# Altium PCB 24+Channel+PCB.pcbdoc (part 4 of 4)
Units mm, origin at the board's own origin, x right, y up, seen from the top; angles counter-clockwise.
Board outline 213.4 x 117.5 mm, 2 copper layers (Top Layer, Bottom Layer); 559 components, 339 nets, 1681 pads, 746 vias.
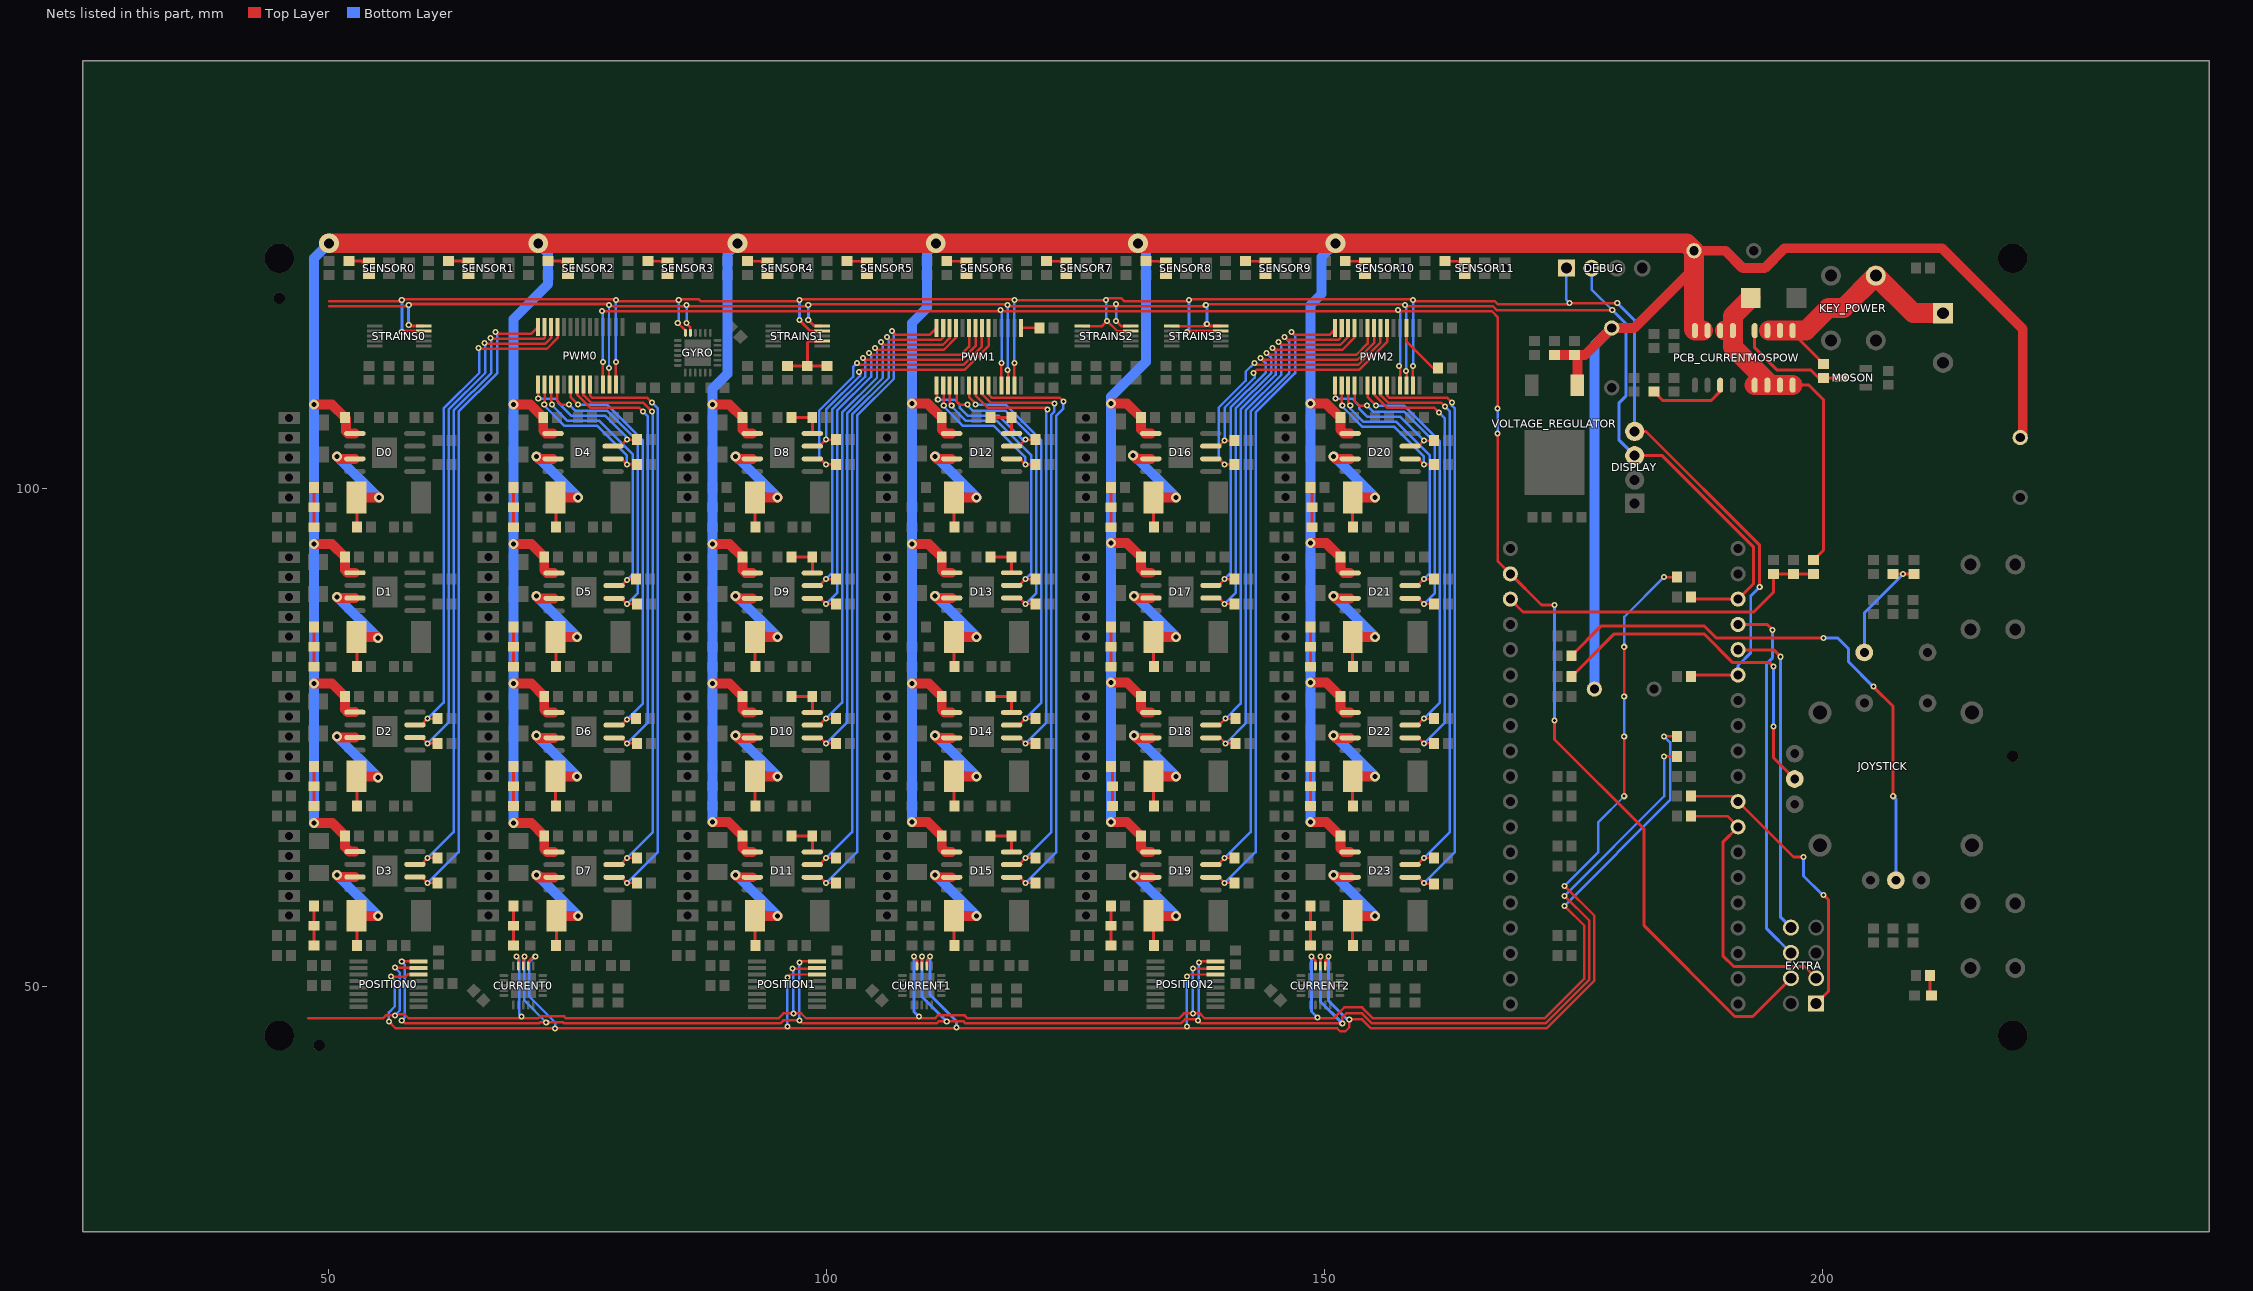
[diagram p4: the nets of this part, all layers, seen from the top]

## Via types
v1: diameter 0.61, hole 0.305, Top Layer to Bottom Layer, 627 vias
v2: diameter 1, hole 0.5, Top Layer to Bottom Layer, 113 vias
v3: diameter 2, hole 1, Top Layer to Bottom Layer, 6 vias

## Nets (pads, with @x,y where several pads share a name; then routed paths per layer and width w, separated by ;. In a path a pad name is that pad's centre, name@x,y a point inside that pad or via, vN(x,y) a via of type N, cw(c..) or ccw(c..) an arc to the next point about the centre after c; other vN are vias at no path point) (continued)
PWM2_3: PWM2.3 RPWM2UP.1 | length 5.6
  Top Layer w0.25: PWM2.3@158.25,116.11 158.25,114.75 160.9,112.1 RPWM2UP.1@161.4,112.1
PWM2A: D2.3 PWM0.11 RPWM2A.2 | length 51.4
  Top Layer w0.25: D2.3@58.723,76.26 59.36,76.26 v1(60,76.9) RPWM2A.2@61,76.9 ; v1@65.2,114.1 65.3,114 71.948,114 73.042,115.094 PWM0.11@73.043,116.21
  Bottom Layer w0.25: v1(60,76.9) 61.6,78.5 61.6,108 65.201,111.602 v1@65.201,114.101
  other v1: 65.1,114.1
PWM2B: D2.2 PWM0.12 RPWM2B.2 | length 53.1
  Top Layer w0.25: D2.2@58.723,74.99 59.41,74.99 v1(60,74.4) RPWM2B.2@61,74.4 ; v1@65.8,114.6 65.9,114.5 71.789,114.5 72.382,115.093 PWM0.12@72.382,116.21
  Bottom Layer w0.25: v1@59.999,74.401 62.1,76.499 62.1,107.901 65.801,111.602 v1@65.801,114.599
  other v1: 65.7,114.6
PWM3A: D3.3 PWM0.13 RPWM3A.2 | length 63.9
  Top Layer w0.25: D3.3@58.723,62.26 59.36,62.26 v1(60,62.9) RPWM3A.2@61,62.9 ; v1@66.4,115.1 66.5,115 71.654,115 71.747,115.094 PWM0.13@71.747,116.21
  Bottom Layer w0.25: v1(60,62.9) 62.6,65.501 62.6,107.799 66.4,111.599 v1@66.4,115.099
  other v1: 66.3,115.1
PWM3B: D3.2 PWM0.14 RPWM3B.2 | length 65.3
  Top Layer w0.25: D3.2@58.723,60.99 59.41,60.99 60,60.4 RPWM3B.2@61,60.4 ; v1@66.9,115.7 67.1,115.5 70.377,115.5 PWM0.14@71.087,116.21
  Bottom Layer w0.25: v1@59.999,60.4 63.101,63.499 63.101,107.7 67,111.599 67,115.6 v1@66.901,115.699
  other v1: 60,60.4 66.8,115.7
PWM4A: D4.3 PWM0.15 RPWM4A.1 | length 14.9
  Top Layer w0.25: PWM0.15@71.087,110.419 71.1,110.405 v1(71.1,109) ; D4.3@78.61,104.235 79.335,104.235 v1(80,104.9) RPWM4A.1@81,104.9
  Bottom Layer w0.25: v1(71.1,109) 72.802,109 73.101,108.701 73.101,108.599 74.401,107.299 77.8,107.299 79.999,105.102 v1@79.999,104.901
PWM4B: D4.2 PWM0.16 RPWM4B.1 | length 16
  Top Layer w0.25: v1(71.7,108.4) 71.747,108.447 PWM0.16@71.747,110.419 ; D4.2@78.61,102.965 79.435,102.965 v1(80,102.4) RPWM4B.1@81,102.4
  Bottom Layer w0.25: v1@71.701,108.399 71.701,108.3 73.7,106.301 77,106.301 79.999,103.301 v1(80,102.4)
PWM5A: D5.3 PWM0.17 RPWM5A.1 | length 27.6
  Top Layer w0.25: PWM0.17@72.382,110.419 72.4,108.5 v1@72.501,108.399 ; D5.3@78.71,90.235 79.435,90.235 v1(80,90.8) 80.1,90.9 RPWM5A.1@80.9,90.9
  Bottom Layer w0.25: v1@72.501,108.399 72.501,108.3 74,106.801 77.198,106.801 80.599,103.4 80.599,91.398 v1(80,90.8)
  other v1: 72.5,108.4
PWM5B: D5.2 PWM0.18 RPWM5B.1 | length 30.7
  Top Layer w0.25: PWM0.18@73.043,110.419 73,110.376 73,108.8 73.4,108.4 v1(74.2,108.4) ; D5.2@78.71,88.965 79.435,88.965 v1(80,88.4) RPWM5B.1@81,88.4
  Bottom Layer w0.25: v1(74.2,108.4) 74.8,107.799 78,107.799 81.099,104.701 81.1,89.5 v1(80,88.4)
PWM6A: D6.3 PWM0.20 RPWM6A.1 | length 41.6
  Top Layer w0.25: PWM0.20@74.338,110.419 74.338,109.162 v1(75.1,108.4) ; D6.3@78.71,76.235 79.435,76.235 v1(80,76.8) 80.1,76.9 RPWM6A.1@80.9,76.9
  Bottom Layer w0.25: v1(75.1,108.4) 78,108.399 81.6,104.8 81.6,104.68 ; v1(80,76.8) 81.6,78.4 81.6,104.8
PWM6B: D6.2 PWM0.21 RPWM6B.1 | length 45.2
  Top Layer w0.25: PWM0.21@74.998,110.419 74.998,109.402 76.301,108.099 81.201,108.099 v1(81.6,107.7) ; D6.2@78.71,74.965 79.435,74.965 v1(80,74.4) RPWM6B.1@81,74.4
  Bottom Layer w0.25: v1(80,74.4) 82.1,76.5 82.1,107.2 v1(81.6,107.7)
PWM7A: D7.3 PWM0.22 RPWM7A.1 | length 57.1
  Top Layer w0.25: PWM0.22@75.633,110.419 75.633,109.367 76.4,108.6 81.6,108.6 v1(82.5,107.7) ; D7.3@78.71,62.235 79.335,62.235 v1(80,62.9) RPWM7A.1@81,62.9
  Bottom Layer w0.25: v1(80,62.9) 82.6,65.5 82.6,107.6 v1(82.5,107.7)
PWM7B: D7.2 PWM0.23 RPWM7B.1 | length 59.9
  Top Layer w0.25: PWM0.23@76.294,110.419 76.3,109.3 76.5,109.1 82,109.1 v1(82.5,108.6) ; D7.2@78.71,60.965 79.435,60.965 80,60.4 RPWM7B.1@81,60.4
  Bottom Layer w0.25: v1@80,60.4 83.1,63.5 83.1,108 v1(82.5,108.6)
  other v1: 80,60.4
PWM8A: D8.3 PWM1.6 RPWM8A.2 | length 26.8
  Top Layer w0.25: D8.3@98.61,104.235 99.335,104.235 v1(100,104.9) RPWM8A.2@101,104.9 ; v1(103.3,111.7) 103.5,111.9 113.9,111.9 116.294,114.294 PWM1.6@116.294,116.11
  Bottom Layer w0.25: v1(100,104.9) 100,107.9 103.4,111.3 103.4,111.6 v1(103.3,111.7)
PWM8B: D8.2 PWM1.7 RPWM8B.2 | length 30
  Top Layer w0.25: D8.2@98.61,102.965 99.435,102.965 v1(100,102.4) RPWM8B.2@101,102.4 ; v1(103.1,112.6) 103.2,112.5 103.2,112.4 113.8,112.4 113.9,112.5 115.633,114.234 PWM1.7@115.633,116.11
  Bottom Layer w0.25: v1(100,102.4) 99.3,103.1 99.3,107.8 102.7,111.2 102.7,112.2 v1(103.1,112.6)
PWM9A: D9.3 PWM1.8 RPWM9A.2 | length 40.3
  Top Layer w0.25: D9.3@98.61,90.235 99.335,90.235 v1(100,90.9) RPWM9A.2@101,90.9 ; v1(103.7,113.1) 103.9,112.9 113.6,112.9 114.998,114.299 PWM1.8@114.998,116.11
  Bottom Layer w0.25: v1@99.999,90.901 100.599,91.5 100.599,107.901 103.901,111.2 103.901,112.9 v1(103.7,113.1)
PWM9B: D9.2 PWM1.9 RPWM9B.2 | length 42.2
  Top Layer w0.25: D9.2@98.61,88.965 99.435,88.965 v1(100,88.4) RPWM9B.2@101,88.4 ; v1(104.3,113.6) 104.3,113.4 113.5,113.4 113.7,113.6 114.338,114.238 PWM1.9@114.338,116.11
  Bottom Layer w0.25: v1(100,88.4) 101.099,89.501 101.099,107.799 104.5,111.2 104.5,113.4 v1@104.3,113.601
PWM10A: D10.3 PWM1.11 RPWM10A.2 | length 51.8
  Top Layer w0.25: D10.3@98.61,76.235 99.335,76.235 v1(100,76.9) RPWM10A.2@101,76.9 ; v1(104.9,114.1) 105.1,113.9 105.999,113.9 111.8,113.9 113.042,115.142 PWM1.11@113.043,116.11
  Bottom Layer w0.25: v1(100,76.9) 101.599,78.5 101.599,107.599 105.1,111.099 105.1,113.9 v1@104.899,114.101
PWM10B: D10.2 PWM1.12 RPWM10B.2 | length 53.7
  Top Layer w0.25: D10.2@98.61,74.965 99.435,74.965 v1(100,74.4) RPWM10B.2@101,74.4 ; v1(105.5,114.7) 105.8,114.4 111.7,114.4 112.382,115.082 PWM1.12@112.382,116.11
  Bottom Layer w0.25: v1@99.999,74.401 102.1,76.499 102.1,107.5 105.699,111.099 105.699,114.5 v1@105.501,114.7
PWM11A: D11.3 PWM1.13 RPWM11A.2 | length 64.5
  Top Layer w0.25: D11.3@98.61,62.235 99.335,62.235 v1(100,62.9) RPWM11A.2@101,62.9 ; v1(106.1,115.2) 106.4,114.9 111.5,114.9 111.747,115.147 PWM1.13@111.747,116.11
  Bottom Layer w0.25: v1(100,62.9) 102.6,65.501 102.6,107.401 106.301,111.101 106.301,115 v1@106.1,115.201
PWM11B: D11.2 PWM1.14 RPWM11B.2 | length 65.9
  Top Layer w0.25: D11.2@98.61,60.965 99.435,60.965 v1(100,60.4) RPWM11B.2@101,60.4 ; v1@106.601,115.8 107,115.399 110.378,115.399 PWM1.14@111.087,116.11
  Bottom Layer w0.25: v1@99.999,60.4 103.101,63.499 103.101,107.299 106.799,111 106.799,115.6 v1@106.601,115.8
  other v1: 106.6,115.8
PWM12A: D12.3 PWM1.15 RPWM12A.1 | length 14.8
  Top Layer w0.25: PWM1.15@111.087,110.319 111.087,109.013 v1(111.2,108.9) ; D12.3@118.61,104.235 119.335,104.235 v1(120,104.9) RPWM12A.1@121,104.9
  Bottom Layer w0.25: v1(111.2,108.9) 112.9,108.899 113.4,108.399 113.4,108.099 114.2,107.299 117.299,107.299 119.7,104.899 v1(120,104.9)
PWM12B: D12.2 PWM1.16 RPWM12B.1 | length 15.8
  Top Layer w0.25: PWM1.16@111.747,110.319 111.8,110.266 v1(111.8,108.3) ; D12.2@118.61,102.965 119.435,102.965 v1(120,102.4) RPWM12B.1@121,102.4
  Bottom Layer w0.25: v1(111.8,108.3) 111.8,108.201 113.7,106.301 116.799,106.301 119.999,103.1 v1(120,102.4)
PWM13A: D13.3 PWM1.17 RPWM13A.1 | length 27.5
  Top Layer w0.25: PWM1.17@112.382,110.319 112.382,108.518 v1(112.6,108.3) ; D13.3@118.623,90.26 119.36,90.26 v1(120,90.9) RPWM13A.1@121,90.9
  Bottom Layer w0.25: v1(112.6,108.3) 112.6,108.201 114,106.801 117.101,106.801 120.601,103.301 120.601,91.5 v1@119.999,90.901
PWM13B: D13.2 PWM1.18 RPWM13B.1 | length 30.7
  Top Layer w0.25: PWM1.18@113.043,110.319 113.1,110.261 113.1,108.7 113.4,108.4 v1(114.2,108.4) ; D13.2@118.623,88.99 119.41,88.99 v1(120,88.4) RPWM13B.1@121,88.4
  Bottom Layer w0.25: v1(114.2,108.4) 114.2,108.3 114.701,107.799 118,107.799 121.099,104.701 121.099,89.501 v1(120,88.4)
PWM14A: D14.3 PWM1.20 RPWM14A.1 | length 41.5
  Top Layer w0.25: PWM1.20@114.338,110.319 114.338,109.161 115.001,108.5 v1(115,108.4) ; D14.3@118.61,76.235 119.335,76.235 v1(120,76.9) RPWM14A.1@121,76.9
  Bottom Layer w0.25: v1(115,108.4) 118,108.399 121.599,104.8 121.599,78.5 v1(120,76.9)
PWM14B: D14.2 PWM1.21 RPWM14B.1 | length 45.8
  Top Layer w0.25: PWM1.21@114.998,110.319 114.998,109.302 116.2,108.1 122,108.1 v1(122.2,107.9) ; D14.2@118.61,74.965 119.435,74.965 v1(120,74.4) RPWM14B.1@121,74.4
  Bottom Layer w0.25: v1@119.999,74.401 122.1,76.499 122.1,107.799 v1@122.199,107.901
PWM15A: D15.3 PWM1.22 RPWM15A.1 | length 58
  Top Layer w0.25: PWM1.22@115.633,110.319 115.633,109.466 116.499,108.599 122.801,108.599 v1(122.9,108.5) ; D15.3@118.61,62.235 119.335,62.235 v1(120,62.9) RPWM15A.1@121,62.9
  Bottom Layer w0.25: v1(120,62.9) 122.6,65.5 122.6,107.4 122.9,107.7 v1(122.9,108.5)
PWM15B: D15.2 PWM1.23 RPWM15B.1 | length 61.2
  Top Layer w0.25: PWM1.23@116.294,110.319 116.294,109.406 116.6,109.1 123.4,109.1 v1(123.8,108.7) ; D15.2@118.61,60.965 119.435,60.965 v1(120,60.4) RPWM15B.1@121,60.4
  Bottom Layer w0.25: v1@119.999,60.4 123.101,63.499 123.101,107.299 123.799,108 v1@123.799,108.701
PWM16A: D16.3 PWM2.6 RPWM16A.2 | length 26.8
  Top Layer w0.25: D16.3@138.61,104.235 139.435,104.235 v1(140,104.8) RPWM16A.2@141,104.8 ; v1(142.9,111.6) 143.2,111.899 153.499,111.899 156.293,114.693 PWM2.6@156.294,116.11
  Bottom Layer w0.25: v1(140,104.8) 140,108.1 143,111.1 143,111.5 v1(142.9,111.6)
PWM16B: D16.2 PWM2.7 RPWM16B.2 | length 29.7
  Top Layer w0.25: D16.2@138.61,102.965 139.435,102.965 v1(140,102.4) RPWM16B.2@141,102.4 ; v1(143,112.6) 143.2,112.399 153.4,112.399 155.633,114.634 PWM2.7@155.633,116.11
  Bottom Layer w0.25: v1(140,102.4) 139.4,102.999 139.4,108.099 142.1,110.799 142.1,111.701 v1(143,112.6)
PWM17A: D17.3 PWM2.8 RPWM17A.2 | length 40.4
  Top Layer w0.25: D17.3@138.623,90.26 139.36,90.26 v1(140,90.9) RPWM17A.2@141,90.9 ; v1(143.6,113.1) 143.799,112.9 153.301,112.9 154.998,114.599 PWM2.8@154.998,116.11
  Bottom Layer w0.25: v1@139.999,90.901 140.601,91.5 140.601,108.099 144.1,111.598 144.1,112.6 v1@143.6,113.1
PWM17B: D17.2 PWM2.9 RPWM17B.2 | length 42.3
  Top Layer w0.25: D17.2@138.623,88.99 139.41,88.99 v1(140,88.4) RPWM17B.2@141,88.4 ; v1@144.2,113.601 144.299,113.499 144.299,113.4 153.2,113.4 154.338,114.538 PWM2.9@154.338,116.11
  Bottom Layer w0.25: v1(140,88.4) 141.099,89.501 141.099,108 144.696,111.597 144.696,113.103 v1@144.2,113.601
  other v1: 144.2,113.6
PWM18A: D18.3 PWM2.11 RPWM18A.2 | length 52
  Top Layer w0.25: D18.3@138.61,76.235 139.435,76.235 v1(140.1,76.9) RPWM18A.2@141.1,76.9 ; v1@144.8,114.101 145,113.9 151.8,113.9 153.042,115.142 PWM2.11@153.043,116.11
  Bottom Layer w0.25: v1(140.1,76.9) 141.599,78.399 141.599,107.901 145.1,111.401 145.1,113.799 v1@144.8,114.101
  other v1: 144.8,114.1
PWM18B: D18.2 PWM2.12 RPWM18B.2 | length 53.8
  Top Layer w0.25: D18.2@138.61,74.965 139.535,74.965 v1(140.1,74.4) RPWM18B.2@141.1,74.4 ; v1@145.399,114.7 145.699,114.401 151.599,114.401 152.382,115.183 PWM2.12@152.382,116.11
  Bottom Layer w0.25: v1@140.101,74.401 142.1,76.4 142.1,107.799 145.699,111.401 145.699,114.401 v1@145.399,114.7
  other v1: 145.4,114.7
PWM19A: D19.3 PWM2.13 RPWM19A.2 | length 64.7
  Top Layer w0.25: D19.3@138.61,62.235 139.335,62.235 v1(140,62.9) RPWM19A.2@141,62.9 ; v1@146.001,115.201 146.301,114.901 151.401,114.901 151.747,115.247 PWM2.13@151.747,116.11
  Bottom Layer w0.25: v1(140,62.9) 142.6,65.501 142.6,107.7 146.499,111.599 146.499,114.7 v1@146.001,115.201
  other v1: 146,115.2
PWM19B: D19.2 PWM2.14 RPWM19B.2 | length 65.9
  Top Layer w0.25: D19.2@138.61,60.965 139.435,60.965 v1(140,60.4) RPWM19B.2@141,60.4 ; v1(146.7,115.7) 146.999,115.399 150.5,115.399 151.086,115.986 PWM2.14@151.087,116.11
  Bottom Layer w0.25: v1@139.999,60.4 143.101,63.499 143.101,107.601 147.071,111.571 147.071,115.328 v1@146.7,115.701
PWM20A: D20.3 PWM2.15 RPWM20A.1 | length 14.8
  Top Layer w0.25: PWM2.15@151.087,110.319 151.1,110.305 v1(151.1,109) ; D20.3@158.61,104.235 159.435,104.235 v1(160,104.8) RPWM20A.1@161,104.8
  Bottom Layer w0.25: v1@151.099,109.001 152.801,109.001 153.499,108.3 153.499,108 154.299,107.2 157.601,107.2 v1(160,104.8)
PWM20B: D20.2 PWM2.16 RPWM20B.1 | length 15.8
  Top Layer w0.25: PWM2.16@151.747,110.319 151.747,108.353 v1(151.8,108.3) ; D20.2@158.61,102.965 159.435,102.965 v1(160,102.4) RPWM20B.1@161,102.4
  Bottom Layer w0.25: v1(151.8,108.3) 151.8,108.201 153.799,106.199 156.999,106.199 159.999,103.199 v1(160,102.4)
PWM21A: D21.3 PWM2.17 RPWM21A.1 | length 27.7
  Top Layer w0.25: PWM2.17@152.382,110.319 152.382,108.518 v1(152.6,108.3) ; D21.3@158.61,90.235 159.335,90.235 v1(160,90.9) RPWM21A.1@161,90.9
  Bottom Layer w0.25: v1(152.6,108.3) 152.6,108 153.901,106.699 157.2,106.699 160.601,103.298 160.601,91.5 v1@159.999,90.901
PWM21B: D21.2 PWM2.18 RPWM21B.1 | length 30.6
  Top Layer w0.25: PWM2.18@153.043,110.319 153.043,108.757 153.5,108.3 v1(154.3,108.3) ; D21.2@158.61,88.965 159.435,88.965 v1(160,88.4) RPWM21B.1@161,88.4
  Bottom Layer w0.25: v1(154.3,108.3) 154.9,107.7 158,107.7 161.099,104.601 161.099,89.501 v1(160,88.4)
PWM22A: D22.3 PWM2.20 RPWM22A.1 | length 41.4
  Top Layer w0.25: PWM2.20@154.338,110.319 154.338,109.162 v1(155.2,108.3) ; D22.3@158.61,76.235 159.335,76.235 v1(160,76.9) RPWM22A.1@161,76.9
  Bottom Layer w0.25: v1(155.2,108.3) 158,108.3 161.6,104.7 161.6,78.5 v1(160,76.9)
PWM22B: D22.2 PWM2.21 RPWM22B.1 | length 45.1
  Top Layer w0.25: PWM2.21@154.998,110.319 154.998,109.402 156.3,108.1 161,108.1 v1(161.5,107.6) ; D22.2@158.61,74.965 159.435,74.965 v1(160,74.4) RPWM22B.1@161,74.4
  Bottom Layer w0.25: v1(160,74.4) 162.1,76.5 162.1,107 v1(161.5,107.6)
PWM23A: D23.3 PWM2.22 RPWM23A.1 | length 57.2
  Top Layer w0.25: PWM2.22@155.633,110.319 155.633,109.367 156.4,108.6 161.7,108.6 v1(162.1,108.2) ; D23.3@158.61,62.235 159.335,62.235 v1(160,62.9) RPWM23A.1@161,62.9
  Bottom Layer w0.25: v1(160,62.9) 162.6,65.5 162.6,107.7 v1(162.1,108.2)
PWM23B: D23.2 PWM2.23 RPWM23B.1 | length 60.1
  Top Layer w0.25: PWM2.23@156.294,110.319 156.294,109.306 156.5,109.1 162.3,109.1 v1(162.8,108.6) ; D23.2@158.61,60.965 159.435,60.965 v1(160,60.4) 160.1,60.3 RPWM23B.1@161,60.3
  Bottom Layer w0.25: v1(160,60.4) 163.1,63.5 163.1,108 162.8,108.3 v1(162.8,108.6)
R0_2: LED0.2 R0.2 | length 2.1
  Top Layer w0.3: R0.2@210.8,51.1 210.8,49.251 LED0.2@210.951,49.1
RBATT_1: MOSON.3 MOSPOW.4 RBATT.1 | length 11.6
  Top Layer w0.3: MOSPOW.4@193.194,115.841 193.194,114.106 195.399,111.899 198.8,111.899 199.6,111.101 RBATT.1@200.101,111.101 ; RBATT.1@200.1,111.1 MOSON.3@201.85,111.1
RCH_2: PCB_CURRENT.7 RCH.2 | length 8
  Top Layer w0.3: RCH.2@183.1,109.7 184,108.8 188.8,108.8 189.735,109.735 PCB_CURRENT.7@189.735,110.36
REXT1_2: PWM1.1 REXT1.2 | length 1.9
  Top Layer w0.25: PWM1.1@119.545,116.11 119.555,116.1 REXT1.2@121.4,116.1
RJ0LP_1: JOYSTICK.H2 RJ0LP.1 | length 55.2
  Top Layer w0.3: RJ0LP.1@174.8,83.2 177.8,86.2 188.1,86.2 189.3,85 v1(200.1,85) ; v1(205.1,80.1) 207.1,78.1 v1(207.1,69.1)
  Bottom Layer w0.3: v1(200.1,85) 201.5,85 202.6,83.9 202.6,82.6 v1(205.1,80.1) ; v1(207.1,69.1) 207.37,68.83 JOYSTICK.H2@207.37,60.67
RJ1LP_1: JOYSTICK.V2 RJ1LP.1 | length 35.6
  Top Layer w0.3: RJ1LP.1@174.8,81.1 179.1,85.4 188.1,85.4 ; 188.099,85.399 191,82.501 194.701,82.501 v1(195.1,82.1) ; v1(195.1,76.1) 195.1,72.94 JOYSTICK.V2@197.21,70.83
  Bottom Layer w0.3: v1(195.1,76.1) v1(195.1,82.1)
RJBTNL_1: JOYSTICK.B1A RJBTNH.1 RJBTNL.1 | length 11.6
  Top Layer w0.3: RJBTNL.1@207.1,91.4 v1(208.1,91.4) ; v1(208.1,91.4) RJBTNH.1@209.2,91.4
  Bottom Layer w0.3: JOYSTICK.B1A@204.195,83.53 204.195,87.495 v1(208.1,91.4)
RL8_1: D8.4 RH8.1 RL8.1 | length 3.7
  Top Layer w0.3: RL8.1@96.5,107.1 RH8.1@98.6,107.1 98.61,107.09 D8.4@98.61,105.505
RL9_1: D9.4 RH9.1 RL9.1 | length 3.7
  Top Layer w0.3: RL9.1@96.5,93.1 RH9.1@98.6,93.1 98.61,93.09 D9.4@98.61,91.505
RL10_1: D10.4 RH10.1 RL10.1 | length 3.7
  Top Layer w0.3: RL10.1@96.5,79.1 RH10.1@98.6,79.1 98.61,79.09 D10.4@98.61,77.505
RL11_1: D11.4 RH11.1 RL11.1 | length 3.7
  Top Layer w0.3: RL11.1@96.5,65.1 RH11.1@98.6,65.1 98.61,65.09 D11.4@98.61,63.505
RL12_1: D12.4 RH12.1 RL12.1 | length 3.7
  Top Layer w0.3: RL12.1@116.5,107.1 RH12.1@118.6,107.1 118.61,107.09 D12.4@118.61,105.505
RL13_1: D13.4 RH13.1 RL13.1 | length 3.7
  Top Layer w0.3: RL13.1@116.5,93.1 RH13.1@118.6,93.1 118.623,93.077 D13.4@118.623,91.53
RL14_1: D14.4 RH14.1 RL14.1 | length 3.7
  Top Layer w0.3: RL14.1@116.5,79.1 RH14.1@118.6,79.1 118.61,79.09 D14.4@118.61,77.505
RL15_1: D15.4 RH15.1 RL15.1 | length 3.7
  Top Layer w0.3: RL15.1@116.5,65.1 RH15.1@118.6,65.1 118.61,65.09 D15.4@118.61,63.505
RM0_2: LEDG0.2 LEDY0.1 RM0.2 | length 4
  Top Layer w0.3: LEDY0.1@48.6,96.1 LEDG0.2@48.6,98.1 RM0.2@48.6,100.1
RM1_2: LEDG1.2 LEDY1.1 RM1.2 | length 4
  Top Layer w0.3: LEDY1.1@48.6,82.1 LEDG1.2@48.6,84.1 RM1.2@48.6,86.1
RM2_2: LEDG2.2 LEDY2.1 RM2.2 | length 4
  Top Layer w0.3: LEDY2.1@48.6,68.1 LEDG2.2@48.6,70.1 RM2.2@48.6,72.1
RM3_2: LEDG3.2 LEDY3.1 RM3.2 | length 4
  Top Layer w0.3: LEDY3.1@48.6,54.1 LEDG3.2@48.6,56.1 RM3.2@48.6,58.1
RM4_2: LEDG4.2 LEDY4.1 RM4.2 | length 4
  Top Layer w0.3: LEDY4.1@68.6,96.1 LEDG4.2@68.6,98.1 RM4.2@68.6,100.1
RM5_2: LEDG5.2 LEDY5.1 RM5.2 | length 4
  Top Layer w0.3: LEDY5.1@68.6,82.1 LEDG5.2@68.6,84.1 RM5.2@68.6,86.1
RM6_2: LEDG6.2 LEDY6.1 RM6.2 | length 4
  Top Layer w0.3: LEDY6.1@68.6,68.1 LEDG6.2@68.6,70.1 RM6.2@68.6,72.1
RM7_2: LEDG7.2 LEDY7.1 RM7.2 | length 4
  Top Layer w0.3: LEDY7.1@68.6,54.1 LEDG7.2@68.6,56.1 RM7.2@68.6,58.1
RM16_2: LEDG16.2 LEDY16.1 RM16.2 | length 4
  Top Layer w0.3: LEDY16.1@128.6,96.1 RM16.2@128.6,100.1
RM17_2: LEDG17.2 LEDY17.1 RM17.2 | length 4
  Top Layer w0.3: LEDY17.1@128.6,82.1 RM17.2@128.6,86.1
RM18_2: LEDG18.2 LEDY18.1 RM18.2 | length 4.1
  Top Layer w0.3: RM18.2@128.6,72.1 128.749,71.951 LEDY18.1@128.749,68.1
RM19_2: LEDG19.2 LEDY19.1 RM19.2 | length 4
  Top Layer w0.3: LEDY19.1@128.6,54.1 RM19.2@128.6,58.1
RM20_2: LEDG20.2 LEDY20.1 RM20.2 | length 4.1
  Top Layer w0.3: RM20.2@148.6,100.1 148.749,99.951 LEDY20.1@148.749,96.1
RM21_2: LEDG21.2 LEDY21.1 RM21.2 | length 4
  Top Layer w0.3: LEDY21.1@148.6,82.1 RM21.2@148.6,86.1
RM22_2: LEDG22.2 LEDY22.1 RM22.2 | length 4
  Top Layer w0.3: LEDY22.1@148.6,68.1 RM22.2@148.6,72.1
RM23_2: LEDG23.2 LEDY23.1 RM23.2 | length 4
  Top Layer w0.3: LEDY23.1@148.6,54.1 RM23.2@148.6,58.1
RST: EXTRA.4 pad.18 PWM0.25 PWM1.25 PWM2.25 | length 201.1
  Top Layer w0.25: v1(77.5,117.8) 117.4,117.8 v1(117.5,117.9) 117.6,117.8 157.3,117.8 157.4,117.9 157.5,117.8 166.8,117.8 167.4,117.2 v1(167.4,108) ; PWM0.25@77.589,110.419 v1(77.589,112.7) ; PWM1.25@117.589,110.319 117.589,112.589 v1(117.6,112.6) ; v1(157.5,112.3) 157.599,112.201 PWM2.25@157.589,110.319 ; v1(167.4,105.5) 167.4,92.69 pad.18@168.67,91.42
  Top Layer w0.3: pad.18@168.671,91.421 171.792,88.3 v1(173.1,88.3) ; v1(173.1,76.7) 173.1,74.8 182.1,65.8 182.1,56.1 191.2,46.999 192.999,46.999 EXTRA.4@196.83,50.83
  Bottom Layer w0.25: v1(77.5,117.8) 77.589,117.711 v1(77.589,112.7) ; v1@117.5,117.901 117.599,117.799 v1(117.6,112.6) ; v1@157.401,117.901 157.599,117.7 157.599,112.399 v1(157.5,112.3) ; v1(167.4,105.5) v1(167.4,108)
  Bottom Layer w0.3: v1(173.1,76.7) v1(173.1,88.3)
  other v1: 157.4,117.9
RX: EXTRA.8 pad.34 | length 32.2
  Top Layer w0.3: pad.34@191.53,83.8 195.1,83.8 v1(195.8,83.1)
  Bottom Layer w0.3: v1(195.8,83.1) 195.8,56.94 EXTRA.8@196.83,55.91
S$57: 
S$67: 
S$69: 
S$140: 
S$142: 
SCL1: DEBUG.2 DISPLAY.P$2 GYRO.23 pad.36 PWM0.26 PWM1.26 PWM2.26 R4.1 STRAINS0.10 STRAINS1.10 STRAINS2.10 STRAINS3.1 STRAINS3.10 | length 221.7
  Top Layer w0.25: 50.101,118.3 58,118.3 v1(58.1,118.4) ; v1(78.2,112.1) 78.2,110.468 PWM0.26@78.25,110.419 ; v1@78.201,118.401 78.302,118.3 85.9,118.3 v1(86,118.4) 86.1,118.3 98.1,118.3 98.201,118.401 98.3,118.5 118.099,118.5 v1@118.201,118.401 ; v1@85.999,116.6 85.999,116.499 86.372,116.128 GYRO.23@86.372,115.612 ; v1(118.2,111.9) 118.25,111.85 PWM1.26@118.25,110.319 ; v1(118.2,118.4) 118.3,118.3 128.9,118.3 v1(129.1,118.5) 129.3,118.3 138,118.3 v1(138.1,118.4) ; v1(129.1,116.8) 129.61,116.29 STRAINS2.10@130.589,116.29 ; STRAINS3.1@134.688,116.29 137.99,116.29 v1@138.2,116.5 ; v1@138.099,118.401 138.201,118.5 157.901,118.5 v1@158.099,118.3 ; v1(158.1,118.4) 158.2,118.3 166.9,118.3 167.3,117.9 v1(178.9,117.9) ; v1(158.2,111.8) 158.25,111.75 PWM2.26@158.25,110.319
  Top Layer w0.3: v1(58.1,116.4) 58.209,116.29 STRAINS0.10@59.589,116.29 ; v1@58.099,118.401 58.201,118.5 78.099,118.5 v1@78.201,118.401 ; v1(98.2,116.9) 98.81,116.29 STRAINS1.10@99.589,116.291 ; v1@138.2,116.5 138.41,116.29 STRAINS3.10@139.59,116.29 ; DISPLAY.P$2@181.151,103.277 183.923,103.277 193.1,94.1 193.1,90.45 pad.36@191.53,88.88 187.02,88.88 R4.1@186.8,89.1
  Bottom Layer w0.25: v1(78.2,112.1) v1(78.2,118.4) ; v1@86,116.6 v1(86,118.4) ; v1(118.2,111.9) v1(118.2,118.4) ; v1(129.1,116.8) v1(129.1,118.5) ; v1(158.1,118.4) 158.2,118.4 v1(158.2,111.8) ; DEBUG.2@176.83,122.1 176.83,119.97 v1(178.9,117.9)
  Bottom Layer w0.3: v1(58.1,116.4) v1(58.1,118.4) ; v1(98.2,116.9) v1(98.2,118.4) ; v1(138.1,118.4) 138.2,118.3 v1@138.2,116.5 ; v1(178.9,117.9) 180.3,116.5 180.3,109.3 179.6,108.6 179.6,104.828 DISPLAY.P$2@181.151,103.277
  other v1: 138.2,116.5 86,116.6
SCL2: EXTRA.3 pad.27 R2.1 | length 29
  Top Layer w0.25: R2.1@186.8,67.1 190.45,67.1 pad.27@191.53,66.02
  Top Layer w0.3: pad.27@191.531,66.021 189.999,64.49 189.999,53.1 191.099,52.001 198.199,52.001 EXTRA.3@199.37,50.83
SDA1: DEBUG.1 DISPLAY.P$1 GYRO.24 pad.33 PWM0.27 PWM1.27 PWM2.27 R3.1 STRAINS0.9 STRAINS1.9 STRAINS2.1 STRAINS2.9 STRAINS3.9 | length 237.4
  Top Layer w0.25: 50.101,118.799 57.3,118.799 v1(57.4,118.9) ; v1@57.401,118.899 57.5,119.001 78.8,119.001 v1@78.9,118.902 ; PWM0.27@78.885,110.419 78.885,112.685 v1(78.9,112.7) ; v1@78.9,118.8 85.1,118.8 85.201,118.899 85.3,119.001 87.2,119.001 87.401,118.8 97.2,118.8 v1(97.3,118.9) ; v1@85.1,116.6 85.872,115.828 GYRO.24@85.872,115.612 ; v1(97.3,118.9) 97.401,119.001 118.8,119.001 v1(118.9,118.9) ; PWM1.27@118.885,110.319 118.885,112.585 v1(118.9,112.6) ; v1(118.9,118.9) v1(128.1,118.9) ; STRAINS2.1@125.686,116.29 127.69,116.29 v1(128.2,116.8) 129.21,115.79 STRAINS2.9@130.589,115.79 ; v1(128.1,118.9) 128.3,119.1 129.6,119.1 129.9,118.8 136.199,118.8 136.4,119.001 158.8,119.001 v1(158.9,118.9) ; PWM2.27@158.885,110.319 158.885,112.284 v1(158.9,112.3) ; v1(158.9,118.9) 159,118.8 167.1,118.8 167.4,118.5 174.5,118.5 v1(174.6,118.6) ; v1(174.6,118.6) v1(179.4,118.6)
  Top Layer w0.3: v1(57.4,115.7) 57.49,115.79 STRAINS0.9@59.589,115.79 ; v1(97.3,116.9) 98.41,115.79 STRAINS1.9@99.589,115.79 ; v1(136.2,115.7) 136.29,115.79 STRAINS3.9@139.59,115.79 ; DISPLAY.P$1@181.151,105.719 182.282,105.718 193.7,94.3 v1(193.7,90.1) ; R3.1@186.8,81.1 186.961,81.26 pad.33@191.53,81.26
  Bottom Layer w0.25: v1(78.9,112.7) v1(78.9,118.9) ; v1@85.1,116.6 85.2,116.7 v1(85.2,118.9) ; v1@118.9,112.613 v1(118.9,118.9) ; v1(128.1,118.9) 128.1,116.9 v1(128.2,116.8) ; v1(158.9,112.3) v1(158.9,118.9) ; DEBUG.1@174.29,122.1 174.29,118.91 v1(174.6,118.6)
  Bottom Layer w0.3: v1(57.4,115.7) v1(57.4,118.9) ; v1(97.3,116.9) v1(97.3,118.9) ; v1(136.2,115.7) 136.4,115.9 v1(136.4,118.9) ; v1(179.4,118.6) 181.151,116.849 DISPLAY.P$1@181.151,105.719 ; pad.33@191.53,81.26 191.53,82.23 192.8,83.5 192.8,89.2 v1(193.7,90.1)
  other v1: 85.1,116.6
SDA2: EXTRA.1 pad.28 R1.1 | length 30.1
  Top Layer w0.25: R1.1@186.8,69.1 190.99,69.1 pad.28@191.53,68.56
  Top Layer w0.3: pad.28@191.53,68.56 197.09,63 v1(198.1,63) ; EXTRA.1@199.37,48.29 200.6,49.52 200.6,58.7 v1(200.1,59.2)
  Bottom Layer w0.3: v1(198.1,63) 198.1,61.1 200,59.2 v1(200.1,59.2)
SENSE0: D0.7 RLP0.2 RS0.2 | length 13.1
  Top Layer w0.3: RS0.2@52.849,99.1 52.9,99.049 RLP0.2@52.9,96.1
  Top Layer w1: v2(50.9,103.2) 51.135,102.965 D0.7@52.69,102.965 ; RS0.2@52.849,99.1 v2(55.1,99.1)
  Bottom Layer w1: v2(50.9,103.2) 55,99.1 v2(55.1,99.1)
SENSE1: D1.7 RLP1.1 RS1.2 | length 12.9
  Top Layer w0.3: RS1.2@52.849,85.1 52.9,85.049 RLP1.1@52.9,82.1
  Top Layer w1: v2(50.9,89.1) 51.01,88.99 D1.7@52.703,88.99 ; RS1.2@52.849,85.1 54.9,85.1 v2(55,85)
  Bottom Layer w1: v2(50.9,89.1) v2(55,85)
SENSE2: D2.7 RLP2.1 RS2.2 | length 12.9
  Top Layer w0.3: RS2.2@52.849,71.1 52.9,71.049 RLP2.1@52.9,68.1
  Top Layer w1: v2(50.9,75.1) 51.01,74.99 D2.7@52.703,74.99 ; RS2.2@52.849,71.1 54.9,71.1 v1(55,71)
  Bottom Layer w1: v2(50.9,75.1) v1(55,71)
  other v2: 55,71
SENSE3: D3.7 RLP3.1 RS3.2 | length 12.9
  Top Layer w0.3: RS3.2@52.849,57.1 52.9,57.049 RLP3.1@52.9,54.1
  Top Layer w1: v2(50.9,61.2) 51.11,60.99 D3.7@52.703,60.99 ; RS3.2@52.849,57.1 v2(55,57.1)
  Bottom Layer w1: v2(50.9,61.2) v2(55,57.1)
SENSE4: D4.7 RLP4.1 RS4.2 | length 13
  Top Layer w0.3: RS4.2@72.849,99.1 72.9,99.049 RLP4.1@72.9,96.1
  Top Layer w1: v2(70.9,103.2) 71.135,102.965 D4.7@72.59,102.965 ; RS4.2@72.849,99.1 v2(75.1,99.1)
  Bottom Layer w1: v2@70.901,103.199 71,103.199 v2(75.1,99.1)
SENSE5: D5.7 RLP5.1 RS5.2 | length 12.9
  Top Layer w0.3: RS5.2@72.849,85.1 72.9,85.049 RLP5.1@72.9,82.1
  Top Layer w1: v2(70.9,89.2) 71.135,88.965 D5.7@72.69,88.965 ; RS5.2@72.849,85.1 v2(75,85.1)
  Bottom Layer w1: v2(70.9,89.2) v2(75,85.1)
SENSE6: D6.7 RLP6.1 RS6.2 | length 12.9
  Top Layer w0.3: RS6.2@72.849,71.1 72.849,68.151 RLP6.1@72.9,68.1
  Top Layer w1: v2(70.9,75.2) 71.135,74.965 D6.7@72.69,74.965 ; RS6.2@72.849,71.1 v2(75,71.1)
  Bottom Layer w1: v2(70.9,75.2) v2(75,71.1)
SENSE7: D7.7 RLP7.1 RS7.2 | length 13
  Top Layer w0.3: RLP7.1@72.9,54.1 72.949,54.149 RS7.2@72.949,57.1
  Top Layer w1: v2(70.9,61.2) 71.135,60.965 D7.7@72.69,60.965 ; RS7.2@72.949,57.1 v2(75.1,57.1)
  Bottom Layer w1: v2(70.9,61.2) 71,61.2 v2(75.1,57.1)
SENSE8: D8.7 RLP8.1 RS8.2 | length 13
  Top Layer w0.3: RS8.2@92.849,99.1 92.849,96.151 RLP8.1@92.9,96.1
  Top Layer w1: v2(90.9,103.2) 91.135,102.965 D8.7@92.59,102.965 ; RS8.2@92.849,99.1 v2(95.1,99.1)
  Bottom Layer w1: v2(90.9,103.2) 91,103.2 v2(95.1,99.1)
SENSE9: D9.7 RLP9.1 RS9.2 | length 13
  Top Layer w0.3: RS9.2@92.849,85.1 92.849,82.151 RLP9.1@92.9,82.1
  Top Layer w1: v2(90.9,89.2) 91.135,88.965 D9.7@92.59,88.965 ; RS9.2@92.849,85.1 v2(95.1,85.1)
  Bottom Layer w1: v2@90.901,89.199 91,89.199 v2(95.1,85.1)
SENSE10: D10.7 RLP10.1 RS10.2 | length 13
  Top Layer w0.3: RS10.2@92.849,71.1 92.849,68.151 RLP10.1@92.9,68.1
  Top Layer w1: v2(90.9,75.2) 91.135,74.965 D10.7@92.59,74.965 ; RS10.2@92.849,71.1 v2(95.1,71.1)
  Bottom Layer w1: v2(90.9,75.2) 91,75.2 v2(95.1,71.1)
SENSE11: D11.7 RLP11.1 RS11.2 | length 13
  Top Layer w0.3: RS11.2@92.849,57.1 92.849,54.151 RLP11.1@92.9,54.1
  Top Layer w1: v2(90.9,61.2) 91.135,60.965 D11.7@92.59,60.965 ; RS11.2@92.849,57.1 v2(95.1,57.1)
  Bottom Layer w1: v2(90.9,61.2) 91,61.2 v2(95.1,57.1)
SENSE12: D12.7 RLP12.1 RS12.2 | length 13
  Top Layer w0.3: RS12.2@112.849,99.1 112.849,96.151 RLP12.1@112.9,96.1
  Top Layer w1: v2(110.9,103.2) 111.135,102.965 D12.7@112.59,102.965 ; RS12.2@112.849,99.1 v2(115.1,99.1)
  Bottom Layer w1: v2(110.9,103.2) 111,103.2 v2(115.1,99.1)
SENSE13: D13.7 RLP13.1 RS13.2 | length 13
  Top Layer w0.3: RS13.2@112.849,85.1 112.849,82.151 RLP13.1@112.9,82.1
  Top Layer w1: v2(110.9,89.2) 111.11,88.99 D13.7@112.603,88.99 ; RS13.2@112.849,85.1 v2(115.1,85.1)
  Bottom Layer w1: v2(110.9,89.2) 111,89.2 v2(115.1,85.1)
SENSE14: D14.7 RLP14.1 RS14.2 | length 13
  Top Layer w0.3: RS14.2@112.849,71.1 112.849,68.151 RLP14.1@112.9,68.1
  Top Layer w1: v2(110.9,75.2) 111.135,74.965 D14.7@112.59,74.965 ; RS14.2@112.849,71.1 v2(115.1,71.1)
  Bottom Layer w1: v2(110.9,75.2) 111,75.2 v2(115.1,71.1)
SENSE15: D15.7 RLP15.2 RS15.2 | length 13
  Top Layer w0.3: RS15.2@112.849,57.1 112.849,54.151 RLP15.2@112.9,54.1
  Top Layer w1: v2(110.9,61.2) 111.135,60.965 D15.7@112.59,60.965 ; RS15.2@112.849,57.1 v2(115.1,57.1)
  Bottom Layer w1: v2(110.9,61.2) 111,61.2 v2(115.1,57.1)
SENSE16: D16.7 RLP16.1 RS16.2 | length 13.2
  Top Layer w0.3: RS16.2@132.849,99.1 132.849,96.151 RLP16.1@132.9,96.1
  Top Layer w1: v2(130.8,103.3) 131.135,102.965 D16.7@132.59,102.965 ; RS16.2@132.849,99.1 v2(135.1,99.1)
  Bottom Layer w1: v2(130.8,103.3) 130.9,103.3 v2(135.1,99.1)
SENSE17: D17.7 RLP17.1 RS17.2 | length 13
  Top Layer w0.3: RS17.2@132.849,85.1 132.849,82.151 RLP17.1@132.9,82.1
  Top Layer w1: v2@130.9,89.2 131.11,88.99 D17.7@132.603,88.99 ; RS17.2@132.849,85.1 v2(135.1,85.1)
  Bottom Layer w1: v2(130.9,89.2) 131,89.2 v2(135.1,85.1)
SENSE18: D18.7 RLP18.1 RS18.2 | length 13
  Top Layer w0.3: RS18.2@132.849,71.1 132.849,68.151 RLP18.1@132.9,68.1
  Top Layer w1: v2@130.9,75.2 131.135,74.965 D18.7@132.59,74.965 ; RS18.2@132.849,71.1 v2(135.1,71.1)
  Bottom Layer w1: v2@130.9,75.2 131,75.2 v2(135.1,71.1)
  other v2: 130.9,75.2
SENSE19: D19.7 RLP19.1 RS19.2 | length 13
  Top Layer w0.3: RS19.2@132.849,57.1 132.849,54.151 RLP19.1@132.9,54.1
  Top Layer w1: v2(130.9,61.2) 131.135,60.965 D19.7@132.59,60.965 ; RS19.2@132.849,57.1 v2(135.1,57.1)
  Bottom Layer w1: v2(130.9,61.2) 131,61.2 v2(135.1,57.1)
SENSE20: D20.7 RLP20.1 RS20.2 | length 13
  Top Layer w0.3: RS20.2@152.849,99.1 152.849,96.151 RLP20.1@152.9,96.1
  Top Layer w1: v2@150.9,103.2 151.135,102.965 D20.7@152.59,102.965 ; RS20.2@152.849,99.1 v2(155.1,99.1)
  Bottom Layer w1: v2@150.9,103.2 151,103.2 v2(155.1,99.1)
  other v2: 150.9,103.2
SENSE21: D21.7 RLP21.1 RS21.2 | length 13
  Top Layer w0.3: RS21.2@152.849,85.1 152.849,82.151 RLP21.1@152.9,82.1
  Top Layer w1: v2@150.9,89.2 151.135,88.965 D21.7@152.59,88.965 ; RS21.2@152.849,85.1 v2(155.1,85.1)
  Bottom Layer w1: v2@150.9,89.2 151,89.2 v2(155.1,85.1)
  other v2: 150.9,89.2
SENSE22: D22.7 RLP22.1 RS22.2 | length 13
  Top Layer w0.3: RS22.2@152.849,71.1 152.849,68.151 RLP22.1@152.9,68.1
  Top Layer w1: v2@150.9,75.2 151.135,74.965 D22.7@152.59,74.965 ; RS22.2@152.849,71.1 v2(155.1,71.1)
  Bottom Layer w1: v2@150.9,75.2 151,75.2 v2(155.1,71.1)
  other v2: 150.9,75.2
SENSE23: D23.7 RLP23.2 RS23.2 | length 13
  Top Layer w0.3: RS23.2@152.849,57.1 152.849,54.151 RLP23.2@152.9,54.1
  Top Layer w1: v2@150.9,61.2 151.135,60.965 D23.7@152.59,60.965 ; RS23.2@152.849,57.1 v2(155.1,57.1)
  Bottom Layer w1: v2@150.9,61.2 151,61.2 v2(155.1,57.1)
  other v2: 150.9,61.2
STRAIN0: RSLP0.1 SENSOR0.P3 | length 2.3
  Top Layer w0.3: RSLP0.1@52.1,122.8 53.393,122.8 SENSOR0.P3@54.093,122.1
STRAIN1: RSLP1.1 SENSOR1.P3 | length 2.3
  Top Layer w0.3: RSLP1.1@62.1,122.8 63.393,122.8 SENSOR1.P3@64.093,122.1
STRAIN2: RSLP2.1 SENSOR2.P3 | length 2.3
  Top Layer w0.3: RSLP2.1@72.1,122.8 73.393,122.8 SENSOR2.P3@74.093,122.1
STRAIN3: RSLP3.1 SENSOR3.P3 | length 2.3
  Top Layer w0.25: RSLP3.1@82.1,122.8 83.393,122.8 SENSOR3.P3@84.093,122.1
STRAIN4: RSLP4.1 SENSOR4.P3 | length 2.3
  Top Layer w0.25: RSLP4.1@92.1,122.8 93.393,122.8 SENSOR4.P3@94.093,122.1
STRAIN5: RSLP5.1 SENSOR5.P3 | length 2.3
  Top Layer w0.25: RSLP5.1@102.1,122.8 103.393,122.8 SENSOR5.P3@104.093,122.1
STRAIN6: RSLP6.1 SENSOR6.P3 | length 2.3
  Top Layer w0.25: RSLP6.1@112.1,122.8 113.393,122.8 SENSOR6.P3@114.093,122.1
STRAIN7: RSLP7.1 SENSOR7.P3 | length 2.3
  Top Layer w0.25: RSLP7.1@122.1,122.8 123.393,122.8 SENSOR7.P3@124.093,122.1
STRAIN8: RSLP8.1 SENSOR8.P3 | length 2.3
  Top Layer w0.25: RSLP8.1@132.1,122.8 133.393,122.8 SENSOR8.P3@134.093,122.1
STRAIN9: RSLP9.1 SENSOR9.P3 | length 2.3
  Top Layer w0.25: RSLP9.1@142.1,122.8 143.393,122.8 SENSOR9.P3@144.093,122.1
STRAIN10: RSLP10.1 SENSOR10.P3 | length 2.3
  Top Layer w0.25: RSLP10.1@152.1,122.8 153.393,122.8 SENSOR10.P3@154.093,122.1
STRAIN11: RSLP11.1 SENSOR11.P3 | length 2.3
  Top Layer w0.25: RSLP11.1@162.1,122.8 163.393,122.8 SENSOR11.P3@164.093,122.1
STRAINS1_7: CS1.1 RSH1.2 RSL1.1 STRAINS1.7 | length 7.9
  Top Layer w0.3: RSH1.2@96.1,112.3 CS1.1@100.101,112.3 ; RSL1.1@98.1,112.3 98.1,114.6 98.29,114.79 STRAINS1.7@99.589,114.79
TX: EXTRA.6 pad.35 | length 37.4
  Top Layer w0.3: pad.35@191.53,86.34 194.46,86.34 v1(195,85.8)
  Bottom Layer w0.3: v1@195,85.8 195,83.001 194.401,82.399 194.401,55.799 EXTRA.6@196.83,53.37
V: DPOW.1 MOSPOW.5 MOSPOW.6 MOSPOW.7 MOSPOW.8 PCB_CURRENT.1 PCB_CURRENT.2 RVH.2 | length 35.9
  Top Layer w0.3: MOSPOW.8@197.004,110.36 198.64,110.36 200.101,108.899 200.101,93.799 RVH.2@199.1,92.801
  Top Layer w2: 190.2,115.84 PCB_CURRENT.1@191.005,115.84 ; DPOW.1@192.8,119.1 191.005,117.305 PCB_CURRENT.1@191.005,115.84 ; MOSPOW.5@193.194,110.36 194.84,110.36 ; MOSPOW.8@197.004,110.36 194.84,110.36 ; PCB_CURRENT.1@191.005,115.84 191.005,114.195 194.84,110.36
V_BATTERY: BATTERY.1 KEY_POWER.1 MOSPOW.1 MOSPOW.2 MOSPOW.3 RBATT.2 | length 25.9
  Top Layer w0.3: MOSPOW.1@197.004,115.84 197.005,115.595 RBATT.2@200.1,112.5
  Top Layer w2: MOSPOW.3@194.65,115.841 198.34,115.841 200.601,118.099 202.1,118.099 KEY_POWER.1@205.351,121.35 ; KEY_POWER.1@205.35,121.35 209.11,117.589 BATTERY.1@212.1,117.588
VCC: C1.1 C2.1 C3.1 C4.1 CD0.2 CD1.2 CD2.2 CD3.2 CD4.2 CD5.2 CD6.2 CD7.2 CD8.2 CD9.2 CD10.2 CD11.2 CD12.2 CD13.2 CD14.2 CD15.2 CD16.2 CD17.2 CD18.2 CD19.2 CD20.2 CD21.2 CD22.2 CD23.2 CVR1.2 CVR2.2 D0.5 D1.5 D2.5 D3.5 D4.5 D5.5 D6.5 D7.5 D8.5 D9.5 D10.5 D11.5 D12.5 D13.5 D14.5 D15.5 D16.5 D17.5 D18.5 D19.5 D20.5 D21.5 D22.5 D23.5 PCB_CURRENT.3 PCB_CURRENT.4 VOLTAGE_REGULATOR.1 | length 753.6
  Top Layer w1: v2(48.6,66.4) 50.424,66.4 CD3.2@51.7,65.124 51.7,64 52.17,63.53 D3.5@52.703,63.53 ; v2(48.6,80.4) 50.4,80.4 CD2.2@51.7,79.1 ; v2(48.6,94.4) 50.4,94.4 51.7,93.1 51.7,91.8 51.97,91.53 D1.5@52.703,91.53 ; v2(48.6,108.4) 50.4,108.4 CD0.2@51.701,107.099 ; CD2.2@51.701,79.1 51.701,77.799 51.97,77.53 D2.5@52.703,77.53 ; CD0.2@51.701,107.098 51.788,107.012 51.788,105.711 51.996,105.506 D0.5@52.689,105.506 ; v2(68.6,66.4) 70.412,66.4 CD7.2@71.7,65.112 ; v2(68.6,80.4) 70.412,80.4 CD6.2@71.7,79.112 ; v2(68.6,94.4) 70.412,94.4 CD5.2@71.7,93.112 ; v2(68.6,108.4) 70.312,108.4 CD4.2@71.6,107.112 71.6,105.799 71.894,105.504 D4.5@72.59,105.505 ; CD7.2@71.701,65.112 71.701,63.799 71.996,63.504 D7.5@72.69,63.505 ; CD6.2@71.701,79.113 71.701,77.799 71.996,77.505 D6.5@72.69,77.505 ; CD5.2@71.701,93.113 71.701,91.8 71.996,91.505 D5.5@72.69,91.505 ; v2(88.6,66.5) 90.2,66.5 CD11.2@91.6,65.1 ; v2(88.6,80.4) 90.3,80.4 CD10.2@91.6,79.1 91.6,77.799 91.894,77.505 D10.5@92.59,77.505 ; v2(88.6,94.4) 90.3,94.4 CD9.2@91.6,93.1 91.6,91.8 91.894,91.505 D9.5@92.59,91.505 ; v2(88.6,108.4) 90.3,108.4 CD8.2@91.6,107.1 91.6,105.899 91.996,105.506 D8.5@92.59,105.506 ; CD11.2@91.6,65.1 91.6,63.9 91.996,63.504 D11.5@92.59,63.505 ; v2(108.6,66.5) 110.2,66.5 CD15.2@111.6,65.1 ; v2(108.6,80.4) 110.3,80.4 CD14.2@111.6,79.1 ; v2(108.6,94.4) 110.3,94.4 111.6,93.1 111.599,91.8 111.869,91.531 D13.5@112.603,91.53 ; v2(108.6,108.5) 110.2,108.5 CD12.2@111.6,107.1 111.599,105.899 111.996,105.506 D12.5@112.59,105.506 ; CD15.2@111.6,65.1 111.599,63.9 111.996,63.504 D15.5@112.59,63.505 ; CD14.2@111.6,79.1 111.599,77.799 111.894,77.505 D14.5@112.59,77.505 ; v2(128.6,66.5) 130.2,66.5 CD19.2@131.6,65.1 ; v2(128.6,80.5) 130.2,80.5 CD18.2@131.6,79.1 131.599,77.901 131.996,77.505 D18.5@132.59,77.505 ; v2(128.6,94.5) 130.2,94.5 CD17.2@131.6,93.1 131.599,91.899 131.97,91.531 D17.5@132.603,91.53 ; v2(128.6,108.5) 130.2,108.5 CD16.2@131.6,107.1 131.599,105.899 131.996,105.506 D16.5@132.59,105.506 ; CD19.2@131.6,65.1 131.599,63.9 131.996,63.504 D19.5@132.59,63.505 ; v2(148.6,66.5) 150.2,66.5 CD23.2@151.6,65.1 ; v2(148.6,80.5) 150.2,80.5 CD22.2@151.6,79.1 151.599,77.901 151.996,77.505 D22.5@152.59,77.505 ; v2(148.6,94.5) 150.2,94.5 CD21.2@151.6,93.1 151.599,91.899 151.996,91.505 D21.5@152.59,91.505 ; v2(148.6,108.5) 150.2,108.5 CD20.2@151.6,107.1 151.599,105.899 151.996,105.506 D20.5@152.59,105.506 ; CD23.2@151.6,65.1 151.599,63.9 151.996,63.504 D23.5@152.59,63.505 ; CVR1.2@173.1,113.4 CVR2.2@175.1,113.4 ; VOLTAGE_REGULATOR.1@175.391,110.352 175.391,113.109 CVR2.2@175.1,113.4 ; C1.1@178.85,116.1 176.15,113.4 CVR2.2@175.1,113.4 ; C1.1@178.851,116.1 181.099,116.1 187.101,122.1 187.101,123.85 190.251,123.85 192.001,122.1 194.2,122.1 196.199,124.101 212.001,124.101 220.101,116.001 220.101,105.351 C3.1@219.85,105.1
  Top Layer w2: v3@50.101,124.599 50.102,124.6 v3(91.1,124.6) v3(111,124.6) v3(131.3,124.6) v3(151.1,124.6) 186.35,124.6 C2.1@187.1,123.85 187.1,115.935 PCB_CURRENT.4@187.195,115.84 188,115.84
  Bottom Layer w1: v2(48.6,66.4) 48.6,73.7 v2(48.6,80.4) v2(48.6,94.4) v2(48.6,108.4) ; v2(48.6,108.4) 48.6,123.1 v3(50.1,124.6) ; v2(68.6,66.4) v2(68.6,80.4) v2(68.6,94.4) v2(68.6,108.4) 68.6,117 72.1,120.5 72.1,123.6 v3(71.1,124.6) ; v2(88.6,66.5) v2(88.6,80.4) v2(88.6,94.4) v2(88.6,108.4) 88.6,110 90.1,111.5 90.1,123.6 v3(91.1,124.6) ; v2(108.6,66.5) 108.6,80.4 v2@108.6,94.101 ; v2(108.6,94.4) v2(108.6,108.5) 108.6,116.6 110.101,118.102 110.101,123.7 v3(111,124.6) ; v2(128.6,66.5) v2(128.6,80.5) v2(128.6,94.5) v2(128.6,108.5) 128.6,109.199 132.1,112.699 132.1,123.8 v3(131.3,124.6) ; v2(148.6,66.5) v2(148.6,80.5) v2(148.6,94.5) v2(148.6,108.5) 148.6,118 148.6,118.4 149.721,119.521 149.721,123.221 v3(151.1,124.6) ; C4.1@177.101,79.849 177.101,114.35 C1.1@178.851,116.1
VOLTAGE_IN: CVLP.2 pad.17 RVH.1 RVL.2 | length 33.6
  Top Layer w0.3: pad.17@168.671,88.881 169.951,87.601 193.101,87.601 195.1,89.601 RVL.2@195.1,91.4 CVLP.2@197.1,91.4 RVH.1@199.1,91.4
VSPI_CLK: CURRENT0.13 CURRENT1.13 CURRENT2.13 POSITION0.16 POSITION1.16 POSITION2.16 RCLCK.1 | length 200.6
  Top Layer w0.25: v1(57.4,52.5) 57.413,52.513 POSITION0.16@59.062,52.513 ; v1@57.401,46.601 57.701,46.301 71.201,46.301 71.3,46.4 v1(71.9,46.4) 73.599,46.4 73.698,46.301 95.399,46.301 95.699,46.601 97.299,46.601 97.6,46.3 111.1,46.3 111.3,46.5 v1(112.1,46.5) 113.8,46.5 114,46.3 135.602,46.3 136.001,46.7 137.2,46.7 137.299,46.601 137.6,46.3 151.1,46.3 ; CURRENT0.13@69.6,52.05 69.6,52.9 v1(69.7,53) ; v1(97.3,52.4) 97.413,52.513 POSITION1.16@99.062,52.513 ; v1(137.4,52.4) 137.513,52.513 POSITION2.16@139.062,52.513 ; 151.1,46.3 v1(151.8,46.3) 151.8,46.9 152.199,47.299 153.799,47.299 154.8,46.301 172.201,46.301 176.601,50.7 176.601,56.601 v1@174.101,59.1 ; v1@184.1,73.1 RCLCK.1@185.4,73.1
  Top Layer w0.3: CURRENT1.13@109.6,52.05 v1(109.6,53) ; CURRENT2.13@149.6,52.05 v1(149.6,53)
  Bottom Layer w0.25: v1@57.401,46.601 57.701,46.9 57.701,52.199 v1@57.401,52.501 ; v1(69.7,53) 69.7,48.6 v1(71.9,46.4) ; v1(97.3,46.6) v1(97.3,52.4) ; v1(137.3,46.6) 137.4,46.7 v1(137.4,52.4) ; v1(174.1,59.1) 184.1,69.1 v1@184.1,73.1
  Bottom Layer w0.3: v1(109.6,53) 109.6,49 v1(112.1,46.5) ; v1(149.6,53) 149.6,48.5 v1(151.8,46.3)
  other v1: 57.4,46.6 184.1,73.1
VSPI_MISO: CURRENT0.14 CURRENT1.14 CURRENT2.14 POSITION0.15 POSITION1.15 POSITION2.15 RMISO.1 | length 206.9
  Top Layer w0.25: 48,46.801 55.501,46.801 55.801,47.101 56.7,47.101 56.799,47.2 57.701,47.2 58.099,46.801 71.099,46.801 71.297,46.999 73.7,46.999 73.898,46.801 95.201,46.801 95.699,47.299 v1(96.7,47.3) 97.5,47.299 98,46.801 109.1,46.801 v1(109.3,47) 109.499,46.799 110.901,46.799 111.201,47.101 113.901,47.101 114.2,46.801 135.399,46.801 135.9,47.299 v1(136.8,47.3) 137.5,47.299 138,46.801 149.199,46.801 v1(149.3,46.9) 149.4,46.799 150.901,46.799 152.001,47.901 153.799,47.901 154.899,46.801 172.1,46.801 176.1,50.799 176.1,56.1 v1@174.101,58.099 ; v1(56.7,51.9) 58.1,51.9 58.147,51.852 POSITION0.15@59.062,51.852 ; v1(68.9,53) 69.1,52.8 CURRENT0.14@69.1,52.05 ; v1(96.6,51.8) 96.624,51.776 POSITION1.15@99.081,51.776 ; v1(136.8,51.8) 139.009,51.8 POSITION2.15@139.062,51.853 ; v1(184.1,75.1) RMISO.1@185.4,75.1
  Top Layer w0.3: v1(108.8,53) 108.8,52.9 109.1,52.6 CURRENT1.14@109.1,52.05 ; v1(148.7,53) 149.1,52.6 CURRENT2.14@149.1,52.05
  Bottom Layer w0.25: v1(56.7,47.1) 57.2,47.6 57.2,51.4 v1(56.7,51.9) ; v1(68.9,53) 69.199,52.701 69.199,47.201 v1(69.4,47) ; v1(96.6,51.8) 96.7,51.7 v1(96.7,47.3) ; v1(136.8,47.3) v1(136.8,51.8) ; v1@174.101,58.099 184.701,68.701 184.701,74.5 v1@184.101,75.099
  Bottom Layer w0.3: v1(108.8,53) 108.8,47.5 v1(109.3,47) ; v1@148.701,52.999 148.701,47.5 v1(149.3,46.9)
  other v1: 174.1,58.1
VSPI_MOSI: CURRENT0.12 CURRENT1.12 CURRENT2.12 POSITION0.14 POSITION1.14 POSITION2.14 RMOSI.1 | length 223.6
  Top Layer w0.25: v1(56.1,46.5) 56.799,45.8 71.302,45.8 v1(72.8,45.8) 95.9,45.8 v1(96.1,46) ; v1(56.3,51) 57.8,51 58.018,51.217 POSITION0.14@59.062,51.217 ; CURRENT0.12@70.1,52.05 70.101,52.501 70.601,53.001 v1@70.799,53.001 ; v1@96.1,46.001 96.302,45.8 113,45.8 v1(113.1,45.9) 113.2,45.8 135.998,45.8 136.199,46.001 136.4,45.8 151.3,45.8 151.599,45.501 152.1,45.501 152.501,45.9 152.501,46.7 153.799,46.7 154.701,45.8 172.3,45.8 177.101,50.601 177.101,57.101 v1@174.101,60.101 ; v1@96.1,50.901 96.4,51.2 POSITION1.14@99.062,51.218 ; v1(136.2,51) 136.4,51.2 POSITION2.14@139.062,51.218 ; v1(180.1,69.1) v1(180.1,75.1) ; v1(180.1,79.1) v1(180.1,84.1) ; v1(184.1,91.1) RMOSI.1@185.4,91.1
  Top Layer w0.3: CURRENT1.12@110.1,52.05 110.101,52.6 110.401,52.9 v1(110.4,53) ; CURRENT2.12@150.1,52.05 150.1,52.6 150.4,52.9 v1(150.4,53)
  Bottom Layer w0.25: v1(56.1,46.5) 56.1,47.401 56.7,48 56.7,50.601 v1@56.301,51 ; v1(70.8,53) 70.2,52.399 70.2,49.001 72.801,46.4 v1@72.801,45.8 ; v1(96.1,46) v1(96.1,50.9) ; v1(136.2,46) v1(136.2,51) ; v1@174.101,60.101 177.5,63.499 177.5,66.499 v1(180.1,69.1) ; v1(180.1,75.1) v1(180.1,79.1) ; v1(180.1,84.1) 180.1,87.1 v1(184.1,91.1)
  Bottom Layer w0.3: v1(110.4,53) 110.401,49.199 113.101,46.499 v1(113.1,45.9) ; v1(150.4,53) 150.401,48.6 152.3,46.7 v1@152.501,46.7
  other v1: 152.5,46.7 174.1,60.1
pads on no net: GYRO.2 GYRO.3 GYRO.4 GYRO.5 GYRO.6 GYRO.7 GYRO.12 GYRO.14 GYRO.15 GYRO.16 GYRO.17 GYRO.19 GYRO.21 GYRO.22 JOYSTICK.B1B JOYSTICK.B2B KEY0.2 KEY0.4 KEY1.2 KEY1.4 KEY_POWER.2 KEY_POWER.4 STRAINS0.2 STRAINS1.2 STRAINS2.2 STRAINS3.2
copper on no net:
  other v1: 205,105.7

## Polygon pours and split planes (outlines as drawn)
GND on Bottom Layer (solid): 38.2,130.2 38.1,38.1 226.1,38.1 226.1,130.1

## Other copper
Bottom Layer:
  pour cut-out net VCC: 170.1,95.6 170.1,86.6 190.1,86.6 190.1,95.6

## Silkscreen, mask and mechanical layers (free items; w line width, h text height)
Top Overlay:
  circle w0.254: c173.902,49.467 r0.127
  circle w0.254: c174.156,49.721 r0.127
  circle w0.254: c174.029,49.594 r0.254
  circle w0.254: c174.029,49.594 r0.508
  circle w0.254: c174.029,49.594 r0.762
  circle w0.254: c186.45,49.467 r0.127
  circle w0.254: c186.704,49.721 r0.127
  circle w0.254: c186.577,49.594 r0.254
  circle w0.254: c186.577,49.594 r0.508
  circle w0.254: c186.577,49.594 r0.762
  lines w0.254: 171.009,88.845 187.009,88.845 189.01,88.845 ; 173.267,51.372 173.267,51.88 174.791,51.88 174.791,51.44 ; 174.791,47.816 174.791,47.308 173.267,47.308 173.267,47.816 172.759,47.816 ; 176.366,45.835 176.566,45.717 176.845,46.175 ; 176.392,45.86 176.646,46.292 ; 176.62,46.292 176.871,46.302 177.027,46.267 ; 176.62,46.318 176.62,51.321 ; 176.62,46.368 176.62,47.283 ; 176.62,49.772 176.62,51.321 ; 176.646,46.953 184.012,46.953 ; 176.798,46.292 cw(c176.868,45.778) 177.242,46.137 ; 176.859,46.191 ccw(c176.743,46.296) 176.9,46.292 ; 177.027,51.321 176.62,51.321 ; 177.226,45.87 177.226,46.073 177.226,46.098 ; 177.242,45.886 ccw(c177.393,45.881) 177.395,45.731 ; 177.242,46.092 ccw(c177.393,46.097) 177.395,45.947 ; 177.379,45.717 183.271,45.717 ; 177.379,45.921 183.271,45.921 ; 183.29,45.731 ccw(c183.293,45.881) 183.443,45.886 ; 183.29,45.947 ccw(c183.293,46.097) 183.443,46.092 ; 183.424,45.87 183.424,46.073 183.424,46.098 ; 183.443,46.137 cw(c183.772,45.876) 183.834,46.292 ; 183.529,51.321 184.037,51.321 ; 183.656,46.292 183.779,46.302 184.037,46.318 184.037,51.321 ; 183.805,46.149 184.084,45.717 184.266,45.835 ; 183.808,46.292 ccw(c183.963,46.27) 183.831,46.186 ; 184.012,46.292 184.266,45.86 ; 184.037,46.368 184.037,47.283 ; 184.037,49.67 184.037,51.321 ; 185.815,51.372 185.815,51.88 187.339,51.88 187.339,51.466 ; 187.339,47.816 187.339,47.308 185.815,47.308 185.815,47.816 185.307,47.816 ; 172.759,47.816 175.299,47.816 175.299,51.372 172.759,51.372 172.759,47.816 ; 176.62,51.321 184.037,51.321 ; 185.307,47.816 187.847,47.816 187.847,51.372 185.307,51.372 185.307,47.816 ; 167.4,47.945 167.4,94.205 cw(c168.4,94.205) 168.4,95.205 191.8,95.205 cw(c191.8,94.205) 192.8,94.205 192.8,47.945 cw(c191.8,47.945) 191.8,46.945 168.4,46.945 cw(c168.4,47.945) 167.4,47.945 ; 171.009,69.345 171.009,81.344 171.009,94.844 189.01,94.844 189.01,69.345 171.009,69.345 ; 172.48,71.07 172.48,86.31 187.72,86.31 187.72,71.07 172.48,71.07
  lines w0.3 net S$140: 172.556,89.358 172.556,93.98 174.588,93.98 174.588,91.39 177.001,91.39 177.001,93.98 179.541,93.98 179.541,91.39 182.132,91.39 182.132,93.98 187.568,93.98 187.568,89.358
  lines w0.3 net S$142: 184.901,89.281 184.901,93.968
  text "SENSOR5" at 109.4,125.672 h1.14 r180
  text "SENSOR0" at 59.301,125.627 h1.14 r180
  text "SENSOR1" at 69.301,125.627 h1.14 r180
  text "SENSOR2" at 79.301,125.627 h1.14 r180
  text "SENSOR3" at 89.301,125.627 h1.14 r180
  text "SENSOR4" at 99.301,125.627 h1.14 r180
  text "SENSOR6" at 119.3,125.627 h1.14 r180
  text "SENSOR7" at 129.3,125.627 h1.14 r180
  text "SENSOR8" at 139.3,125.627 h1.14 r180
  text "SENSOR9" at 149.3,125.627 h1.14 r180
  text "SENSOR10" at 159.3,125.627 h1.14 r180
  text "SENSOR11" at 169.3,125.627 h1.14 r180
  text "6V5-15V" at 210.643,123.893 h2.03 r315
  text "SDA SCL 3V3 GND" at 172.8,122.824 h0.8
  text "POWER-BTN" at 198.601,122.115 h1
  text "TOOLING / HOLE 1" at 43.601,116.136 h0.5
  text "GND" at 216.601,110.536 h2.03
  text "OUT0" at 45.733,101.059 h1.14 r90
  text "OUT4" at 65.734,101.005 h1.14 r90
  text "OUT8" at 85.734,101.018 h1.14 r90
  text "OUT12" at 105.734,101.018 h1.14 r90
  text "OUT16" at 125.734,101.018 h1.14 r90
  text "OUT20" at 145.734,101.018 h1.14 r90
  text "OUT1" at 45.733,87.084 h1.14 r90
  text "OUT5" at 65.734,87.03 h1.14 r90
  text "OUT9" at 85.734,87.018 h1.14 r90
  text "OUT13" at 105.734,87.018 h1.14 r90
  text "OUT17" at 125.734,87.018 h1.14 r90
  text "OUT21" at 145.734,87.018 h1.14 r90
  text "OUT2" at 45.733,73.084 h1.14 r90
  text "OUT6" at 65.734,73.03 h1.14 r90
  text "OUT10" at 85.734,73.018 h1.14 r90
  text "OUT14" at 105.734,73.018 h1.14 r90
  text "OUT18" at 125.734,73.017 h1.14 r90
  text "OUT22" at 145.734,73.018 h1.14 r90
  text "TOOLING / HOLE 3" at 217.901,69.836 h0.5
  text "ESP-WROOM-32" at 174.1,66.838 h1.02
  text "OUT3" at 45.733,59.083 h1.14 r90
  text "OUT7" at 65.734,59.017 h1.14 r90
  text "OUT11" at 85.734,59.017 h1.14 r90
  text "OUT15" at 105.734,59.017 h1.14 r90
  text "OUT19" at 125.734,59.017 h1.14 r90
  text "OUT23" at 145.734,59.017 h1.14 r90
  text "Designed by Jobson" at 190.354,50.652 h0.76 r89
  text "SDA SCL 3V3 GND" at 202.976,47.125 h0.8 r90
  text "OPT RST TX RX" at 195.136,47.095 h0.8 r90
  text "TOOLING / HOLE 2" at 48,46.45 h0.5
Bottom Overlay:
  text "3V3 GND IN" at 79.8,124.8 h0.8
  text "3V3 GND IN" at 89.8,124.8 h0.8
  text "3V3 GND IN" at 119.8,124.8 h0.8
  text "3V3 GND IN" at 59.873,124.764 h0.8
  text "3V3 GND IN" at 99.773,124.764 h0.8
  text "3V3 GND IN" at 109.773,124.764 h0.8
  text "3V3 GND IN" at 69.8,124.7 h0.8
  text "3V3 GND IN" at 129.8,124.7 h0.8
  text "3V3 GND IN" at 139.8,124.7 h0.8
  text "3V3 GND IN" at 149.8,124.7 h0.8
  text "3V3 GND IN" at 159.8,124.7 h0.8
  text "3V3 GND IN" at 169.8,124.7 h0.8
  text "MA MB IN 5V GND" at 130.2,107.7 h0.8 r90
  text "MA MB IN 5V GND" at 50.436,107.6 h0.8 r90
  text "MA MB IN 5V GND" at 150.3,107.6 h0.8 r90
  text "MA MB IN 5V GND" at 90.1,107.5 h0.8 r90
  text "MA MB IN 5V GND" at 110,107.5 h0.8 r90
  text "MA MB IN 5V GND" at 70.2,107.4 h0.8 r90
  text "MA MB IN 5V GND" at 90.3,93.8 h0.8 r90
  text "MA MB IN 5V GND" at 50.436,93.6 h0.8 r90
  text "MA MB IN 5V GND" at 130.3,93.6 h0.8 r90
  text "MA MB IN 5V GND" at 150.3,93.6 h0.8 r90
  text "MA MB IN 5V GND" at 70.2,93.5 h0.8 r90
  text "MA MB IN 5V GND" at 110.1,93.5 h0.8 r90
  text "MA MB IN 5V GND" at 130.3,79.7 h0.8 r90
  text "MA MB IN 5V GND" at 150.3,79.7 h0.8 r90
  text "MA MB IN 5V GND" at 50.436,79.6 h0.8 r90
  text "MA MB IN 5V GND" at 110.236,79.6 h0.8 r90
  text "MA MB IN 5V GND" at 70.3,79.5 h0.8 r90
  text "MA MB IN 5V GND" at 90.3,79.5 h0.8 r90
  text "MA MB IN 5V GND" at 150.3,65.7 h0.8 r90
  text "MA MB IN 5V GND" at 50.436,65.6 h0.8 r90
  text "MA MB IN 5V GND" at 70.2,65.6 h0.8 r90
  text "MA MB IN 5V GND" at 90.4,65.6 h0.8 r90
  text "MA MB IN 5V GND" at 110.3,65.6 h0.8 r90
  text "MA MB IN 5V GND" at 130.3,65.6 h0.8 r90